# Altium PCB Receiver - BlackChat.PcbDoc
Units mil, origin at the board's own origin, x right, y up, seen from the top; angles counter-clockwise.
Board outline 1715 x 1265 mil, 2 copper layers (Top Layer, Bottom Layer); 45 components, 23 nets, 104 pads, 17 vias.
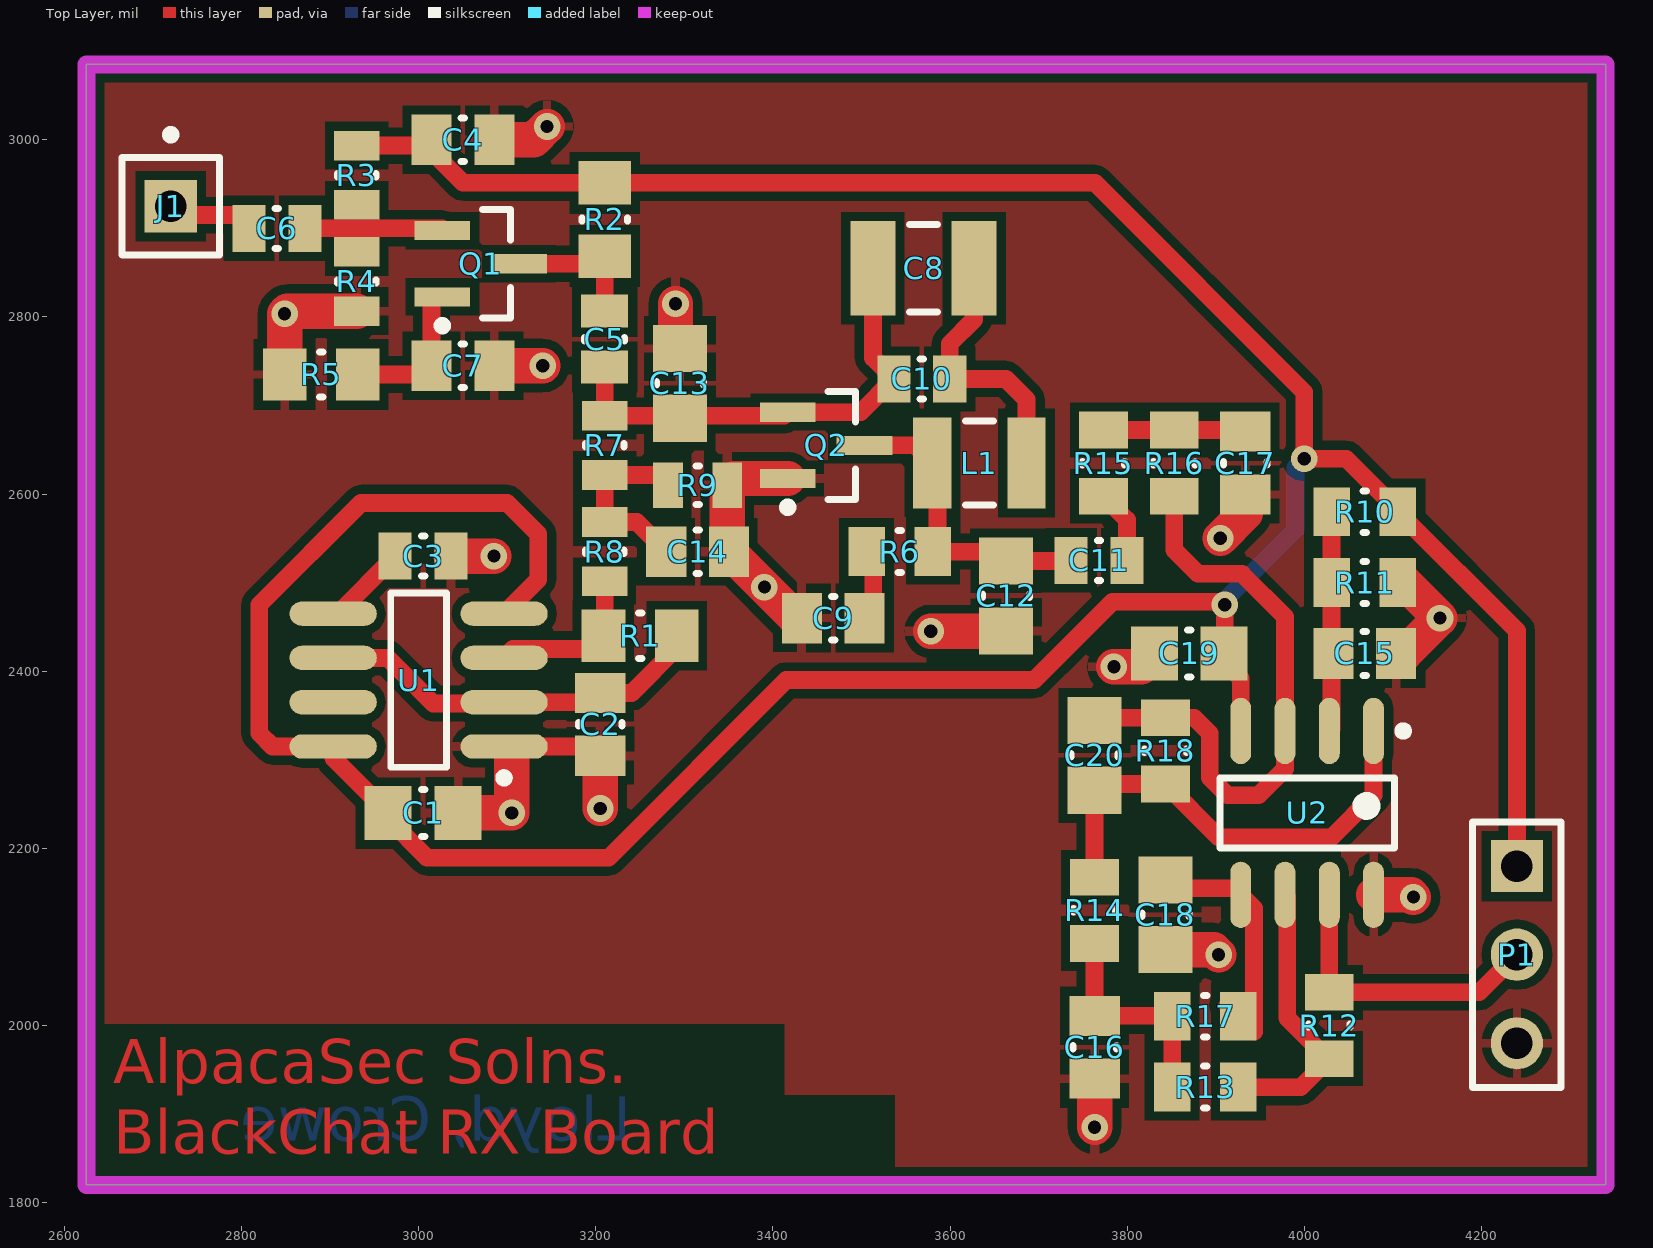
[diagram p0: Top Layer view]
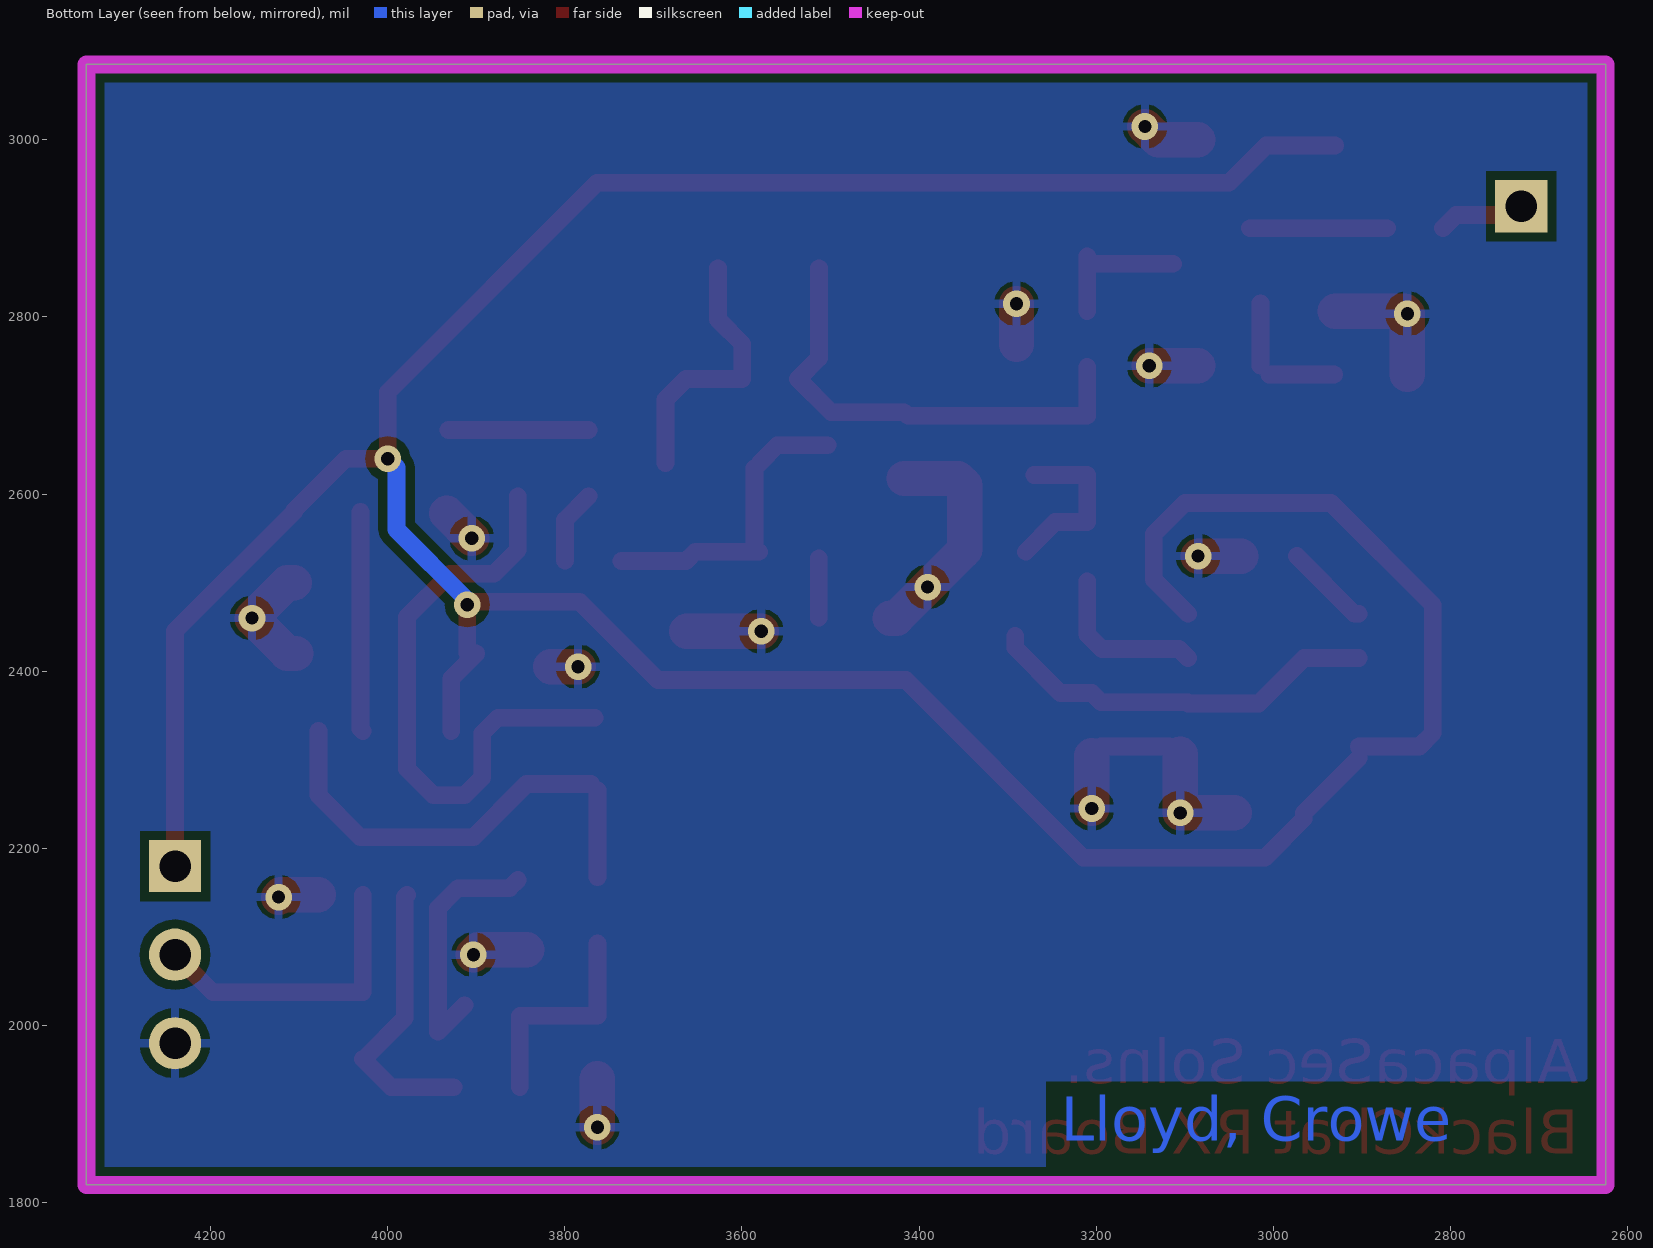
[diagram p1: Bottom Layer view, seen from below]

## Layer stack, top to bottom
Top Layer: signal copper 1.4
Dielectric: dielectric 12.6, FR-4, Dk 4.8
Bottom Layer: signal copper 1.4

## Board outline
2625,1820 4340,1820 4340,3085 2625,3085

## Design rules (kind name [scope] priority, off if disabled: settings)
Clearance [All] p1: gap=10
PolygonConnect [All] p1: connectstyle=Relief reliefconductorwidth=10 reliefentries=4 polygonreliefangle="90 Angle" airgapwidth=10
RoutingVias [All] p1: holewidth=28 width=50 viastyle="Through Hole" minholewidth=28 minwidth=50 maxholewidth=28 maxwidth=50
SolderMaskExpansion [All] p1: expansion=4
Width [All] p1: maxlimit=100 minlimit=10 preferedwidth=10 minimp=50.000000 maximp=50.000000 favimp=50.000000
28 further rules are at their usual default settings.

## Components (designator, comment, footprint, x,y, rotation, side; value= is the part's Value field where it differs from the comment)
C1 "CAP 100nF 25V 0805(2012)" CAPC0805(2012)100_M 3005,2240 r0 top
C2 "CAP 1nF 25V 0805(2012)" CAPC0805(2012)100_N 3205,2340 r90 top
C3 "CAP 10nF 25V 0805(2012)" CAPC0805(2012)75_L 3005,2530 r180 top
C4 "CAP 1nF 16V 0805(2012)" CAPC0805(2012)145_N 3050,3000 r180 top
C5 "CAP 2.2pF 16V 0805(2012)" CAPC0805(2012)75_L 3210,2775 r270 top
C6 "CAP 22pF 16V 0805(2012)" CAPC0805(2012)75_L 2840,2900 r0 top
C7 "CAP 560pF 16V 0805(2012)" CAPC0805(2012)145_N 3050,2745 r0 top
C8 "REPLACE WITH REAL PART" C1210_N 3570,2855 r0 top
C9 "CAP 10nF 16V 0805(2012)" CAPC0805(2012)145_N 3468.15,2460 r180 top
C10 "CAP 1.5pF 16V 0805(2012)" CAPC0805(2012)100_L 3568.15,2730 r0 top
C11 "CAP 100nF 16V 0805(2012)" CAPC0805(2012)100_L 3768.15,2525 r0 top
C12 "CAP 5.6pF 16V 0805(2012)" CAPC0805(2012)75_M 3663.15,2485 r90 top
C13 "CAP 5.6pF 16V 0805(2012)" CAPC0805(2012)75_M 3295,2725 r270 top
C14 "CAP 560pF 16V 0805(2012)" CAPC0805(2012)145_N 3315,2535 r180 top
C15 "CAP 10nF 16V 0805(2012)" CAPC0805(2012)145_N 4068.15,2420 r180 top
C16 "CAP 10nF 16V 0805(2012)" CAPC0805(2012)145_N 3763.15,1975.43 r90 top
C17 "CAP 1nF 25V 0805(2012)" CAPC0805(2012)100_N 3933.15,2635 r90 top
C18 "CAP 100nF 25V 0805(2012)" CAPC0805(2012)100_M 3843.15,2125 r270 top
C19 "CAP 100nF 25V 0805(2012)" CAPC0805(2012)100_M 3870,2420 r180 top
C20 "CAP 5.6pF 16V 0805(2012)" CAPC0805(2012)75_M 3763.15,2305 r90 top
J1 "Socket" PIN1 2720,2925 r0 top
L1 "56nH" C1210 3633.15,2635 r180 top
P1 "Header 3" HDR1X3 4240,2180 r270 top
Q1 "NE68033" SOT95P275X120-3N 3070,2860 r0 top
Q2 "NE68033" SOT95P275X120-3N 3460,2655 r0 top
R1 "3K3 5% 0805(2012)" RESC0805(2012)_M 3250,2440 r0 top
R2 "300R 1% 0805(2012)" RESC0805(2012)_M 3210,2910 r90 top
R3 "47K 5% 0805(2012)" RESC0805(2012)_L 2930,2960 r90 top
R4 "20K 5% 0805(2012)" RESC0805(2012)_L 2930,2840 r90 top
R5 "100R 5% 0805(2012)" RESC0805(2012)_M 2890,2735 r0 top
R6 "1K 5% 0805(2012)" RESC0805(2012)_N 3543.15,2535 r180 top
R7 "47K 5% 0805(2012)" RESC0805(2012)_L 3210,2655 r90 top
R8 "10K 5% 0805(2012)" RESC0805(2012)_L 3210,2535 r270 top
R9 "10K 5% 0805(2012)" RESC0805(2012)_L 3315,2610 r180 top
R10 "47K 1% 0805(2012)" RESC0805(2012)_N 4068.15,2580 r180 top
R11 "47K 1% 0805(2012)" RESC0805(2012)_N 4068.15,2500 r0 top
R12 "1M 1% 0805(2012)" RESC0805(2012)_N 4028.15,2000 r90 top
R13 "1K 5% 0805(2012)" RESC0805(2012)_N 3888.15,1930.43 r0 top
R14 "1K 5% 0805(2012)" RESC0805(2012)_N 3763.15,2130 r270 top
R15 "47K 1% 0805(2012)" RESC0805(2012)_N 3773.15,2635 r90 top
R16 "20K 1% 0805(2012)" RESC0805(2012)_N 3853.15,2635 r270 top
R17 "1M 1% 0805(2012)" RESC0805(2012)_N 3888.15,2010.43 r0 top
R18 "1M 1% 0805(2012)" RESC0805(2012)_N 3843.15,2310 r270 top
U1 "LMC555CM/NOPB" M08A_M 3000,2390 r180 top
U2 "TLC27M2BCD" TI-D8_L 4003.15,2240 r270 top

## Footprints (in the part's own frame and the unit in brackets; to place one, negate y for a bottom-side part, rotate by r counter-clockwise, add the part's x,y. Pads: shape width x height; smd on the part's side, far side on the other; paste and mask are expansions set on the pad)
C1210 [mm] "Chip Capacitor, Body 3.2x2.5mm, IPC High Density"
  rect 1.1x2.6 smd: 1(-1.35,0) 2(1.35,0)
  silkscreen extent -0.4,-1.2 0.4,1.2, body extent -1.7,-1.35 1.7,1.35, height 1.3
C1210_N [mm] "Chip Capacitor, Body 3.2x2.5mm, IPC Medium Density"
  rect 1.3x2.7 smd: 1(-1.45,0) 2(1.45,0)
  silkscreen extent -0.4,-1.25 0.4,1.25, body extent -1.7,-1.35 1.7,1.35, height 1.5
CAPC0805(2012)75_L [mm] "Chip Capacitor, Body 2.0x1.2mm, Height 0.75mm, IPC High Density"
  rect 0.95x1.35 smd: 1(-0.8,0) 2(0.8,0)
  silkscreen extent -0.05,-0.58 0.05,0.58, body extent -1.1,-0.72 1.1,0.72, height 0.75
CAPC0805(2012)75_M [mm] "Chip Capacitor, Body 2.0x1.2mm, Height 0.75mm, IPC Low Density"
  rect 1.35x1.55 smd: 1(-1,0) 2(1,0)
  silkscreen extent -0.05,-0.67 0.05,0.68, body extent -1.1,-0.72 1.1,0.72, height 0.75
CAPC0805(2012)100_L [mm] "Chip Capacitor, Body 2.0x1.2mm, Height 1.0mm, IPC High Density"
  rect 0.95x1.35 smd: 1(-0.8,0) 2(0.8,0)
  silkscreen extent -0.05,-0.58 0.05,0.58, body extent -1.1,-0.72 1.1,0.72, height 1
CAPC0805(2012)100_M [mm] "Chip Capacitor, Body 2.0x1.2mm, Height 1.0mm, IPC Low Density"
  rect 1.35x1.55 smd: 1(-1,0) 2(1,0)
  silkscreen extent -0.05,-0.67 0.05,0.67, body extent -1.1,-0.72 1.1,0.72, height 1
CAPC0805(2012)100_N [mm] "Chip Capacitor, Body 2.0x1.2mm, Height 1.0mm, IPC Medium Density"
  rect 1.15x1.45 smd: 1(-0.9,0) 2(0.9,0)
  silkscreen extent -0.05,-0.62 0.05,0.62, body extent -1.1,-0.72 1.1,0.73, height 1
CAPC0805(2012)145_N [mm] "Chip Capacitor, Body 2.0x1.2mm, Height 1.45mm, IPC Medium Density"
  rect 1.15x1.45 smd: 1(-0.9,0) 2(0.9,0)
  silkscreen extent -0.05,-0.62 0.05,0.62, body extent -1.1,-0.72 1.1,0.73, height 1.45
HDR1X3 [mm] "Connector; Header; 3 Position"
  rect 1.5x1.5 hole 0.9: 1(0,0)
  round 1.5 hole 0.9: 2(2.54,0) 3(5.08,0)
  silkscreen extent -1.27,-1.27 6.35,1.27
M08A_M [mm] "SOIC, 8-Leads, Body 4.9x3.9mm, Pitch 1.27mm, IPC Low Density"
  oval 2.5x0.7 smd: 1(-2.45,1.905) 2(-2.45,0.635) 3(-2.45,-0.635) 4(-2.45,-1.905) 5(2.45,-1.905) 6(2.45,-0.635) 7(2.45,0.635) 8(2.45,1.905)
  silkscreen extent -2.58,-2.5 0.8,2.93, body extent -2,-2.5 2,2.5, height 1.75
PIN1 [mm] "Connector; Plug"
  rect 1.5x1.5 hole 0.9: 1(0,0)
  silkscreen extent -1.4,-1.4 1.4,2.17
RESC0805(2012)_L [mm] "Chip Resistor, Body 2.0x1.3mm, IPC High Density"
  rect 0.85x1.3 smd: 1(-0.85,0) 2(0.85,0)
  silkscreen extent -0.05,-0.55 0.05,0.55, body extent -1.1,-0.67 1.1,0.68, height 0.7
RESC0805(2012)_M [mm] "Chip Resistor, Body 2.0x1.3mm, IPC Low Density"
  rect 1.25x1.5 smd: 1(-1.05,0) 2(1.05,0)
  silkscreen extent -0.05,-0.65 0.05,0.65, body extent -1.1,-0.67 1.1,0.67, height 0.7
RESC0805(2012)_N [mm] "Chip Resistor, Body 2.0x1.3mm, IPC Medium Density"
  rect 1.05x1.4 smd: 1(-0.95,0) 2(0.95,0)
  silkscreen extent -0.05,-0.6 0.05,0.6, body extent -1.1,-0.67 1.1,0.68, height 0.7
SOT95P275X120-3N [mm] "SOT23, 3-Leads, Body 2.90x2.75mm, Pitch 0.95mm, IPC Medium Density"
  rect 1.6x0.55 smd: 1(-1.1,-0.95) 2(-1.1,0.95) 3(1.1,0)
  silkscreen extent -1.22,-1.9 0.85,1.55, body extent -0.85,-1.55 0.85,1.55, height 1.2
TI-D8_L [mm] "SOIC, 8-Leads, Body 4.9x3.9mm, Pitch 1.27mm, IPC High Density"
  oval 1.9x0.6 smd: 1(-2.35,1.905) 2(-2.35,0.635) 3(-2.35,-0.635) 4(-2.35,-1.905) 5(2.35,-1.905) 6(2.35,-0.635) 7(2.35,0.635) 8(2.35,1.905)
  silkscreen extent -2.47,-2.5 1,2.88, body extent -2,-2.5 2,2.5, height 1.75

## Part data
C1 C18 C19: library part CMP-1036-04409-1, "CAP 100nF 25V ±5% 0805 (2012 Metric) Thickness 1mm SMD"
C2 C17: library part CMP-1036-02963-1, "CAP 1nF 25V ±1% 0805 (2012 Metric) Thickness 1mm SMD"
C3: library part CMP-1036-03827-1, "CAP 10nF 25V ±5% 0805 (2012 Metric) Thickness 0.75mm SMD"
C4: library part CMP-1036-02959-1, "CAP 1nF 16V ±10% 0805 (2012 Metric) Thickness 1.45mm SMD"
C5: library part CMP-1036-00271-1, "CAP 2.2pF 16V ±0.5pF 0805 (2012 Metric) Thickness 0.75mm SMD"
C6: library part CMP-1036-01219-1, "CAP 22pF 16V ±5% 0805 (2012 Metric) Thickness 0.75mm SMD"
C7 C14: library part CMP-1036-02734-1, "CAP 560pF 16V ±10% 0805 (2012 Metric) Thickness 1.45mm SMD"
C8: library part "Cap Var", "Variable or Adjustable Capacitor"
C9 C15 C16: library part CMP-1036-03817-1, "CAP 10nF 16V ±5% 0805 (2012 Metric) Thickness 1.45mm SMD"
C10: library part CMP-1036-00160-1, "CAP 1.5pF 16V ±0.1pF 0805 (2012 Metric) Thickness 1mm SMD"
C11: library part CMP-1036-04400-1, "CAP 100nF 16V ±5% 0805 (2012 Metric) Thickness 1mm SMD"
C12 C13 C20: library part CMP-1036-00602-1, "CAP 5.6pF 16V ±0.25pF 0805 (2012 Metric) Thickness 0.75mm SMD"
L1: library part Inductor, "Generic Inductor"
P1: "Header, 3-Pin"
Q1 Q2: "NPN SILICON HIGH FREQUENCY TRANSISTOR"
R1: library part CMP-1013-00086-1, "3K3 0.125W 5% 0805 (2012 Metric)  SMD"
R2: library part CMP-1013-00449-1, "300R 0.125W 1% 0805 (2012 Metric)  SMD"
R3 R7: library part CMP-1013-00114-1, "47K 0.125W 5% 0805 (2012 Metric)  SMD"
R4: library part CMP-1013-00105-1, "20K 0.125W 5% 0805 (2012 Metric)  SMD"
R5: library part CMP-1013-00050-1, "100R 0.125W 5% 0805 (2012 Metric)  SMD"
R6 R13 R14: library part CMP-1013-00074-1, "1K 0.125W 5% 0805 (2012 Metric)  SMD"
R8 R9: library part CMP-1013-00098-1, "10K 0.125W 5% 0805 (2012 Metric)  SMD"
R10 R11 R15: library part CMP-1013-00699-1, "47K 0.125W 1% 0805 (2012 Metric)  SMD"
R12 R17 R18: library part CMP-1013-00849-1, "1M 0.125W 1% 0805 (2012 Metric)  SMD"
R16: library part CMP-1013-00655-1, "20K 0.125W 1% 0805 (2012 Metric)  SMD"
U1: library part CMP-0056-00124-2, "CMOS Timer, 8-pin Narrow SOIC, Pb-Free"
U2: library part CMP-0017-00353-1, "LinCMOS(TM) Precision Dual Operational Amplifier, 3 to 16 V, 0 to 70 degC, 8-pin SOIC (D8), Green (RoHS & no Sb/Br)"

## Via types
v1: diameter 30, hole 15, Top Layer to Bottom Layer, 17 vias

## Nets (pads, with @x,y where several pads share a name; then routed paths per layer and width w, separated by ;. In a path a pad name is that pad's centre, name@x,y a point inside that pad or via, vN(x,y) a via of type N, cw(c..) or ccw(c..) an arc to the next point about the centre after c; other vN are vias at no path point)
5V0: C1.1 C4.2 C19.1 P1.1 R2.2 R3.2 R10.1 U1.4 U1.8 U2.4 | length 4102.7
  Top Layer w20: U1.8@2903.54,2302.09 C1.1 2965.63,2233.37 3009.51,2189.49 3214.49,2189.49 3415,2390 3695,2390 3783.43,2478.43 v1@3910,2478.43 ; U1.8 2835,2315 2820,2330 2820,2475 2935,2590 3100,2590 3135,2555 3135,2503.54 U1.4 ; R3.2 3008.03,2993.46 3050.16,2951.34 3763.66,2951.34 4000,2715 v1(4000,2640) 4047.26,2640 4105.55,2581.71 R10.1 4240,2445.55 P1.1 ; C19.1@3900,2420 3928.15,2391.85 U2.4@3928.15,2332.52 ; C19.1@3910,2420.63 v1@3910,2480
  Bottom Layer w20: v1(3910,2475) 3910,2480 3990,2560 3990,2630 v1(4000,2640)
AMP_BUFFER: C5.1 Q1.3 R2.1 | length 147.5
  Top Layer w20: Q1.3 R2.1@3198.66,2860 ; C5.1 R2.1
ANTENNA: C6.1 J1.1 | length 98.9
  Top Layer w20: J1.1 2730,2915 2793.5,2915 C6.1
DATA_RX: P1.2 R12.2 U2.7 | length 339.6
  Top Layer w20: U2.7@4028.15,2147.48 4028.15,2037.4 4197.4,2037.4 P1.2
DETECTOR: C11.1 C12.2 L1.2 Q2.3 R6.1 | length 339.1
  Top Layer w20: Q2.3 3560,2655 L1.2 ; R6.1 3652.52,2535 3663.15,2524.37 C11.1@3736.02,2524.37 ; R6.1@3585.75,2535 L1.2@3585.75,2629.25
FILTER: C16.2 R13.1 R14.2 R17.1 | length 248.9
  Top Layer w20: R14.2@3763.15,2092.6 3763.15,2010.87 R17.1@3850.32,2010.87 ; R13.1 R17.1
GND: C1.2 C2.1 C3.1 C4.1 C7.2 C9.2 C12.1 C13.1 C14.1 C15.1 C16.1 C17.1 C18.2 C19.2 P1.3 Q2.1 R4.1 R5.1 R9.1 R11.2 U1.1 U2.8 | length 1350.6
  Top Layer w20: U1.1@3117.32,2315 3194.57,2315 C2.1
  Top Layer w40: R5.1 v1(2848.66,2803.66) 2851.54,2806.54 R4.1 ; C3.1 v1(3085,2530) ; C1.2 v1(3105,2240) U1.1@3105,2306.46 ; C7.2 v1(3140,2745) ; C4.1 3130,3000 v1(3145,3015) ; v1(3205,2245) C2.1 ; C13.1@3290,2769.37 v1(3290,2815) ; C14.1@3348.46,2536.97 R9.1 3356.06,2617.6 Q2.1 ; C14.1 3425.43,2460 C9.2 ; v1(3578.15,2445) C12.1@3662.52,2445 ; v1(3763.15,1885) C16.1@3763.15,1940 ; v1(3785,2405) C19.2@3815.63,2405 ; C18.2@3843.15,2085.63 3897.52,2085.63 v1(3903.15,2080) ; v1(3905,2550) C17.1@3933.15,2578.15 ; U2.8@4078.15,2147.48 4120.67,2147.48 v1(4123.15,2145) ; C15.1 4113.15,2420 v1(4153.15,2460) 4113.15,2500 R11.2
  other v1: 3390.43,2495
NetC2_2: C2.2 R1.2 U1.2 U1.6 | length 449.6
  Top Layer w20: U1.6 2965,2415 3016.46,2363.54 3096.46,2363.54 U1.2 3194.57,2365 C2.2 3240.43,2375.43 3291.34,2426.34 R1.2
NetC3_2: C3.2 U1.5 | length 96.9
  Top Layer w20: U1.5 2908.5,2465 C3.2
NetC5_2: C5.2 C8.1 C10.1 C13.2 Q2.2 R7.2 | length 528.2
  Top Layer w20: C5.2 R7.2 Q2.2@3412.76,2688.46 ; Q2.2 3499.06,2692.4 C10.1 3512.91,2753.74 C8.1
NetC6_2: C6.2 Q1.2 R3.1 R4.2 | length 155.2
  Top Layer w20: C6.2 Q1.2@3026.69,2900
NetC7_1: C7.1 Q1.1 R5.2 | length 143.7
  Top Layer w20: R5.2 C7.1@3004.57,2735 ; C7.1 Q1.1@3014.57,2815.47
NetC8_2: C8.2 C10.2 L1.1 | length 304.5
  Top Layer w20: C8.2 3627.09,2797.09 3599.65,2769.65 C10.2 3663.15,2730 3686.3,2706.85 L1.1
NetC9_1: C9.1 R6.2 | length 67.2
  Top Layer w20: C9.1@3513.15,2460.43 R6.2@3513.15,2527.6
NetC11_2: C11.2 R15.1 | length 83.6
  Top Layer w20: R15.1@3773.15,2597.6 3799.65,2571.1 C11.2
NetC14_2: C14.2 R7.1 R8.1 R9.2 | length 196.5
  Top Layer w20: R9.2@3270,2621.54 R7.1 R8.1 3246.1,2568.46 C14.2
NetC15_2: C15.2 R10.2 R11.1 U2.2 | length 248.6
  Top Layer w20: U2.2@4028.15,2332.52 4030.75,2335.12 R10.2
NetC17_2: C17.2 R15.2 R16.1 | length 158
  Top Layer w20: R15.2@3773.15,2672.4 C17.2@3931.18,2672.4
NetC18_1: C18.1 R17.2 U2.5 | length 285.3
  Top Layer w20: C18.1@3853.15,2164.37 3862.52,2155 3920.63,2155 3928.15,2147.48 3943.15,2132.48 3943.15,1992.83 R17.2@3913.15,2022.83
NetC20_1: C20.1 R14.1 R18.2 U2.1 | length 523.3
  Top Layer w20: R14.1@3763.15,2167.4 C20.1@3763.15,2265.63 ; C20.1@3770.12,2272.6 3843.15,2272.6 3903.15,2212.6 4030.75,2212.6 4078.15,2260 U2.1@4078.15,2332.52
NetC20_2: C20.2 R16.2 R18.1 U2.3 | length 678.3
  Top Layer w20: C20.2@3766.18,2347.4 3875.75,2347.4 3893.15,2330 3893.15,2280 3913.15,2260 3948.15,2260 3978.15,2290 3978.15,2461.35 3929.5,2510 3880,2510 3853.15,2536.85 R16.2@3853.15,2597.6
NetR12_1: R12.1 R13.2 U2.6 | length 322.5
  Top Layer w20: R13.2 3995.98,1930.43 4028.15,1962.6 4026.44,1962.6 3980.59,2008.45 3980.59,2145.04 U2.6@3978.15,2147.48
QUENCH: R1.1 R8.2 U1.3 | length 182.8
  Top Layer w20: U1.3 3106.46,2425 3193.66,2425 R1.1 ; R1.1@3210,2441.34 R8.2
pads on no net: U1.7

## Polygon pours and split planes (outlines as drawn)
GND on Bottom Layer "Ground Plane" (solid, remove dead copper, pour order 2): 2625,1820 4340,1820 4340,3085 2625,3085
GND on Top Layer "Ground Plane" (solid, remove dead copper, pour order 2): 2624.61,1820 4339.61,1820 4339.61,3085 2624.61,3085

## Keep-outs
Keep-Out Layer:
  lines w20: 2625,3010 2625,3085 4340,3085 4340,1820 2625,1820 2625,2150 2625,3025

## Other copper
Top Layer:
  text "AlpacaSec Solns." at 2655,1935 h50
  text "BlackChat RX Board" at 2655,1855 h50
Bottom Layer:
  text "Lloyd, Crowe" at 3240,1870 h50